# Altium PCB CPU_DIN_boards_v1_0.PcbDoc
Units mm, origin at the board's own origin, x right, y up, seen from the top; angles counter-clockwise.
Board outline 155 x 85 mm, 2 copper layers (Top Layer, Bottom Layer), stack 1.571 mm thick; 85 components, 84 nets, 319 pads, 107 vias.
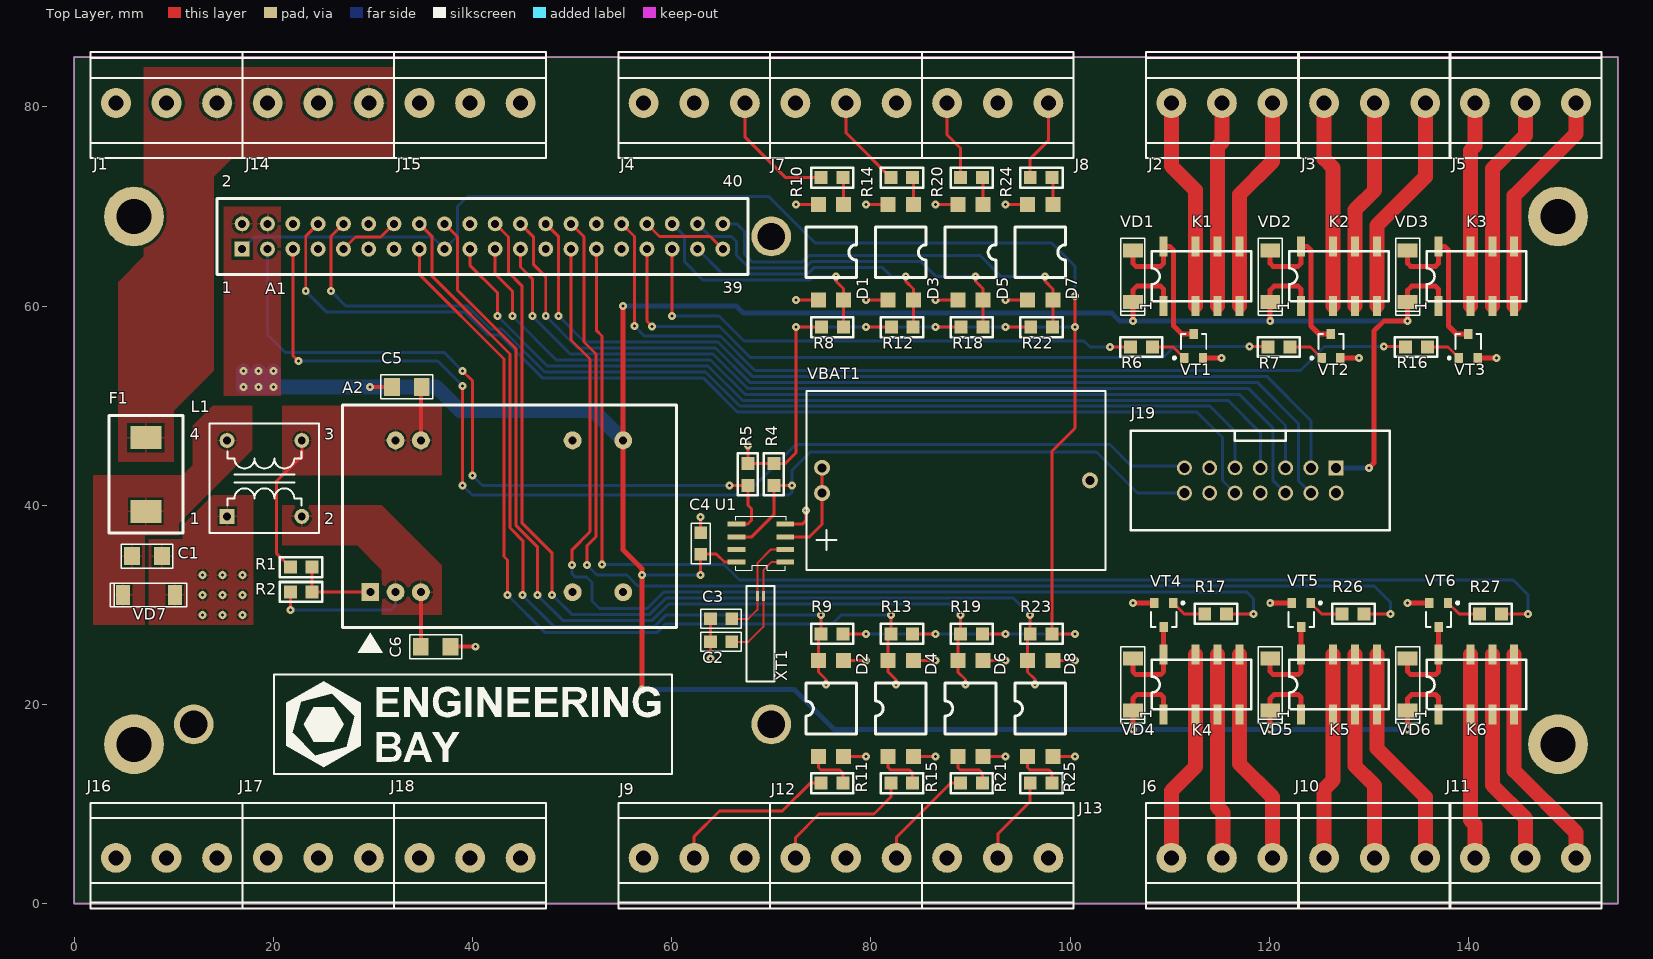
[diagram p0: Top Layer view]
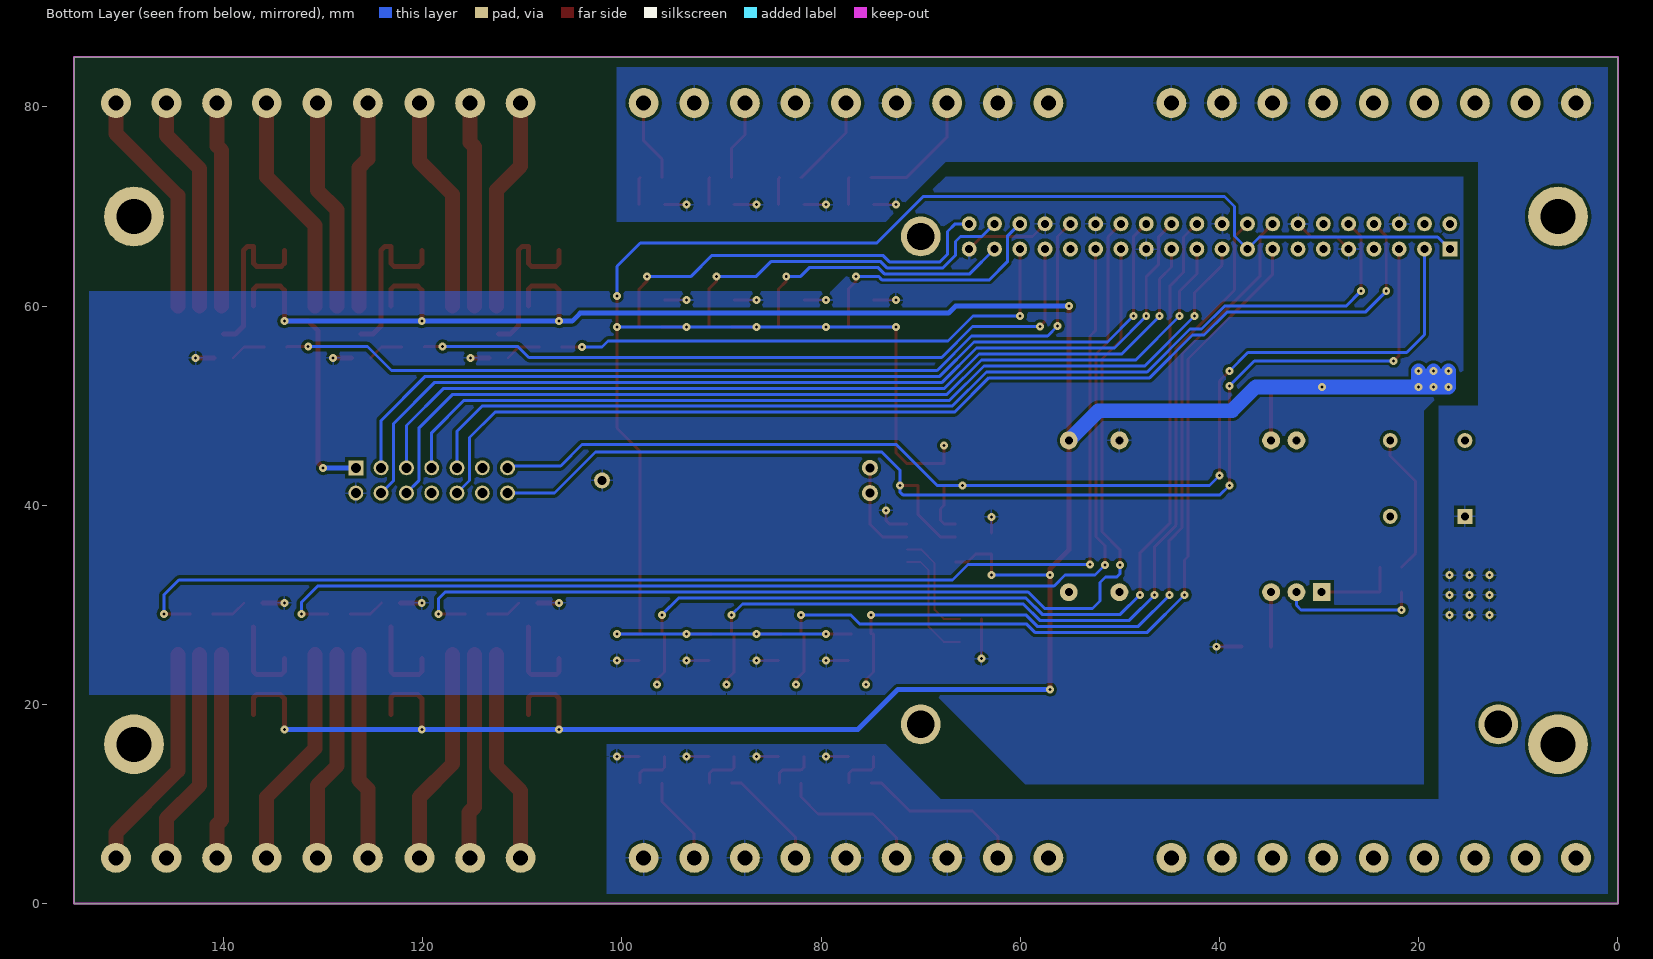
[diagram p1: Bottom Layer view, seen from below]
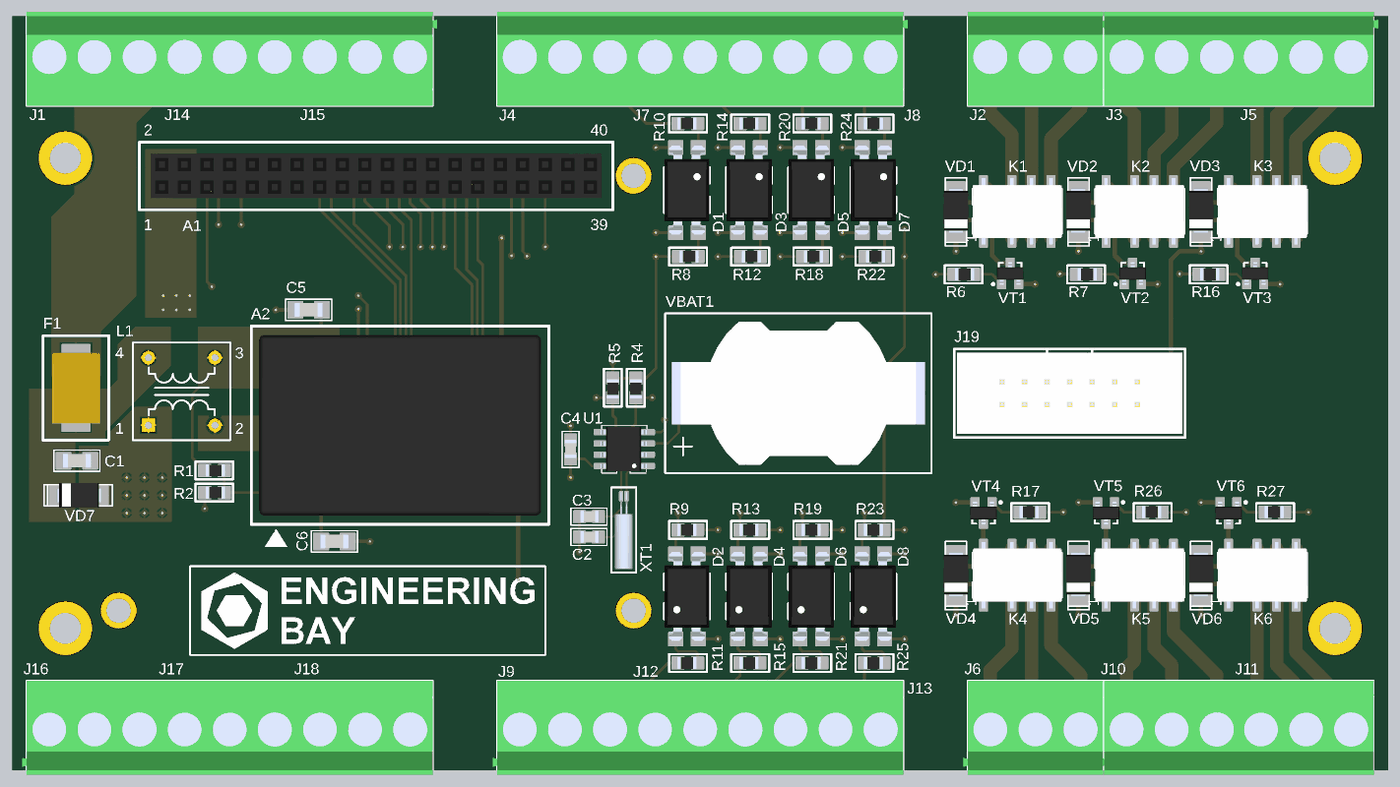
[diagram p2: 3D render of the assembled board from above, using the file's embedded part models]

## Layer stack, top to bottom
Top Solder: solder mask 0.0102, Solder Resist, Dk 3.5
Top Layer: signal copper 0.0356
Dielectric1: core 1.5, FR-4, Dk 4.8
Bottom Layer: signal copper 0.0356
Bottom Solder: solder mask 0.0102, Solder Resist, Dk 3.5

## Board outline
0,85 155,85 155,0 0,0

## Design rules (kind name [scope] priority, off if disabled: settings)
Clearance [All] p1: gap=0.3 ignorepadtopadclearanceinfootprint=FALSE except(0: Arc-Hole Track-Hole SMDPad-Hole THPad-Hole Via-Hole Fill-Hole Poly-Hole Region-Hole Text-Hole)
Clearance Logo_polygon [InNamedPolygon('logo')] p2: gap=0.01 ignorepadtopadclearanceinfootprint=FALSE except(0: Arc-Hole Track-Hole SMDPad-Hole THPad-Hole Via-Hole Fill-Hole Poly-Hole Region-Hole Text-Hole)
Clearance Polygon [InPolygon] p3: gap=0.3 ignorepadtopadclearanceinfootprint=FALSE except(0: Arc-Hole Track-Hole SMDPad-Hole THPad-Hole Via-Hole Fill-Hole Poly-Hole Region-Hole Text-Hole)
DiffPairsRouting [All] p1: maxlimit=0.2 minlimit=0.2 mostfreqgap=0.2 toplayer_minwidth=0.381 toplayer_maxwidth=0.381 toplayer_prefwidth=0.381 bottomlayer_minwidth=0.381 bottomlayer_maxwidth=0.381 bottomlayer_prefwidth=0.381 maxuncoupledlength=12.7
HoleSize [All] p1: absolutevalues=TRUE maxlimit=4 minlimit=0.025 maxpercent=80.000 minpercent=20.000
HoleToHoleClearance [All] p1: gap=0.3 allowstackedmicrovias=TRUE
MinimumSolderMaskSliver [All] p1: minsoldermaskwidth=0.1
PasteMaskExpansion [All] p1: expansion=0.1
PlaneClearance [All] p1: clearance=0.5
PlaneConnect [All] p1: planeconnectstyle=Relief reliefexpansion=0.5 reliefentries=4 reliefconductorwidth=0.2 reliefairgap=0.2
PolygonConnect [All] p1: connectstyle=Relief reliefconductorwidth=0.2 reliefentries=4 polygonreliefangle="90 Angle" airgapwidth=0.254
RoutingCorners [All] p1: cornerstyle=45-Degree minsetback=2.5 maxsetback=2.5
RoutingVias [All] p1: holewidth=0.3 width=0.8 viastyle="Through Hole" minholewidth=0.3 minwidth=0.8 maxholewidth=0.5 maxwidth=1.5
SilkToSilkClearance [All] p1: silktosilkclearance=0
SilkToSolderMaskClearance SilkscreenOverComponentPads [IsPad] p1: minsilkscreentomaskgap=0 clearancetoexposedcopper=TRUE
SolderMaskExpansion [All] p1: expansion=0.1
Width [All] p1: maxlimit=2 minlimit=0.2 preferedwidth=0.2 minimp=50.000000 maximp=50.000000 favimp=50.000000
20 further rules are at their usual default settings.

## Classes and differential pairs
component class CPU_DIN_mainboard: A1 C2 C3 C4 D1 D2 D3 D4 D5 D6 D7 D8 J2 J3 J4 J5 J6 J7 J8 J9 J10 J11 J12 J13 J16 J17 J18 J19 K1 K2 K3 K4 K5 K6 R4 R5 R6 R7 R8 R9 R10 R11 R12 R13 R14 R15 R16 R17 R18 R19 R20 R21 R22 R23 R24 R25 R26 R27 U1 VBAT1 VD1 VD2 VD3 VD4 VD5 VD6 VT1 VT2 VT3 VT4 VT5 VT6 XT1
component class CPU_DIN_mainboard_power: A2 C1 C5 C6 F1 J1 J14 J15 L1 R1 R2 VD7

## Components (designator, comment, footprint, x,y, rotation, side; value= is the part's Value field where it differs from the comment)
A1 "Raspberri Pi model B+" PBD-40 16.87,65.73 r0 top locked
A2 "TEN8-1211" dcdc_ten8-1211 43.7,38.9 r0 top
C1 "4.7uF x 50V" C1206 7.3,34.9 r0 top
C2 "12pF" C0805 66.034,26.3 r180 top
C3 "12pF" C0805 66.034,28.6 r180 top
C4 "0.1uF" C0805 62.9,37.234 r270 top
C5 "1000pF x 2kV" c1206 33.4,51.9 r180 top
C6 "1000pF x 2kV" c1206 36.3,25.8 r0 top
D1 "FOD817" DIP4_300mil_SMD 76,65.4 r270 top
D2 "FOD817" DIP4_300mil_SMD 76,19.6 r90 top
D3 "FOD817" DIP4_300mil_SMD 83,65.4 r270 top
D4 "FOD817" DIP4_300mil_SMD 83,19.6 r90 top
D5 "FOD817" DIP4_300mil_SMD 90,65.4 r270 top
D6 "FOD817" DIP4_300mil_SMD 90,19.6 r90 top
D7 "FOD817" DIP4_300mil_SMD 97,65.4 r270 top
D8 "FOD817" DIP4_300mil_SMD 97,19.6 r90 top
F1 "FUSE" MF-SM100 7.2,43.1 r270 top
J1 "Terminal block TB-3" TB-3_ser370 9.27,80.4 r180 top locked
J2 "Terminal block TB-3" TB-3_ser370 115.25,80.4 r180 top
J3 "Terminal block TB-3" TB-3_ser370 130.59,80.4 r180 top
J4 "Terminal block TB-3" TB-3_ser370 62.26,80.4 r180 top
J5 "Terminal block TB-3" TB-3_ser370 145.73,80.4 r180 top
J6 "Terminal block TB-3" TB-3_ser370 115.25,4.6 r0 top
J7 "Terminal block TB-3" TB-3_ser370 77.5,80.4 r180 top
J8 "Terminal block TB-3" TB-3_ser370 92.74,80.4 r180 top
J9 "Terminal block TB-3" TB-3_ser370 62.26,4.6 r0 top
J10 "Terminal block TB-3" TB-3_ser370 130.59,4.6 r0 top
J11 "Terminal block TB-3" TB-3_ser370 145.73,4.6 r0 top
J12 "Terminal block TB-3" TB-3_ser370 77.5,4.6 r0 top
J13 "Terminal block TB-3" TB-3_ser370 92.74,4.6 r0 top locked
J14 "Terminal block TB-3" TB-3_ser370 24.51,80.4 r180 top locked
J15 "Terminal block TB-3" TB-3_ser370 39.75,80.4 r180 top locked
J16 "Terminal block TB-3" TB-3_ser370 9.27,4.6 r0 top locked
J17 "Terminal block TB-3" TB-3_ser370 24.51,4.6 r0 top locked
J18 "Terminal block TB-3" TB-3_ser370 39.75,4.6 r0 top locked
J19 "IDC14" IDC14 119.1,42.5 r180 top
K1 "IM03GR" TYCO_2C 109.4,60 r0 top
K2 "IM03GR" TYCO_2C 123.2,60 r0 top
K3 "IM03GR" TYCO_2C 137,60 r0 top
K4 "IM03GR" TYCO_2C 109.4,19 r0 top
K5 "IM03GR" TYCO_2C 123.2,19 r0 top
K6 "IM03GR" TYCO_2C 137,19 r0 top
L1 "Common Mode Choke" TCK-050 19.1,42.7 r0 top
R1 "10k" R0805 23.9,33.8 r180 top
R2 "10k" R0805 23.9,31.3 r180 top
R4 "10k" R0805 70.25,42 r90 top
R5 "10k" R0805 67.65,42 r90 top
R6 "1k" R0805 108.277,55.9 r180 top
R7 "1k" R0805 122.077,55.9 r180 top
R8 "10k" R0805 77.25,57.9 r180 top
R9 "10k" R0805 75,27.1 r0 top
R10 "1.2k" R0805 75,72.9 r0 top
R11 "1.2k" R0805 75,12.1 r0 top
R12 "10k" R0805 84.25,57.9 r180 top
R13 "10k" R0805 82,27.1 r0 top
R14 "1.2k" R0805 82,72.9 r0 top
R15 "1.2k" R0805 82,12.1 r0 top
R16 "1k" R0805 135.877,55.9 r180 top
R17 "1k" R0805 113.523,29.1 r0 top
R18 "10k" R0805 91.25,57.9 r180 top
R19 "10k" R0805 89,27.1 r0 top
R20 "1.2k" R0805 89,72.9 r0 top
R21 "1.2k" R0805 89,12.1 r0 top
R22 "10k" R0805 98.25,57.9 r180 top
R23 "10k" R0805 96,27.1 r0 top
R24 "1.2k" R0805 96,72.9 r0 top
R25 "1.2k" R0805 96,12.1 r0 top
R26 "1k" R0805 127.323,29.1 r0 top
R27 "1k" R0805 141.123,29.1 r0 top
U1 "DS1307" SO-8_LM358D 71.4,34.3 r90 top
VBAT1 "Battery 2032" Battery_CR2032 102,42.5 r180 top
VD1 "BAV199" "SMA DIOD" 106.3,65.6 r270 top
VD2 "BAV199" "SMA DIOD" 120.1,65.6 r270 top
VD3 "BAV199" "SMA DIOD" 133.9,65.6 r270 top
VD4 "BAV199" "SMA DIOD" 106.3,24.6 r270 top
VD5 "BAV199" "SMA DIOD" 120.1,24.6 r270 top
VD6 "BAV199" "SMA DIOD" 133.9,24.6 r270 top
VD7 "15MQ040N" "SMA DIOD" 10.1,31 r180 top
VT1 "BC817" SOT23 112.4,56 r0 top
VT2 "BC817" SOT23 126.2,56 r0 top
VT3 "BC817" SOT23 140,56 r0 top
VT4 "BC817" SOT23 109.4,29 r180 top
VT5 "BC817" SOT23 123.2,29 r180 top
VT6 "BC817" SOT23 137,29 r180 top
XT1 "32kHz" XTAL_d2x6mm 68.9,28.9 r90 top

## Footprints (in the part's own frame and the unit in brackets; to place one, negate y for a bottom-side part, rotate by r counter-clockwise, add the part's x,y. Pads: shape width x height; smd on the part's side, far side on the other; paste and mask are expansions set on the pad)
Battery_CR2032 [mm]
  round 1.6 hole 0.9: 1(26.9,-1.27) 2(26.9,1.27) 3(0,0)
  silkscreen extent -1.55,-9 28.45,9, body extent -0.8,-8.05 27.7,8.05, height 5.2
C0805 [mil]
  rect 50x50 smd: 1(0,0) 2(84,0)
  silkscreen extent -38,-38 122,38, body extent -2,-27 81,27, height 53
C1206 [mm]
  rect 1.6x1.8 smd: 1(-1.5,0) 2(1.5,0)
  silkscreen extent -2.6,-1.2 2.6,1.2, body extent -1.6,-0.8 1.6,0.8, height 1.5
c1206 [mm]
  rect 1.6x1.8 smd: 1(-1.5,0) 2(1.5,0)
  silkscreen extent -2.6,-1.2 2.6,1.2, body extent -1.6,-0.8 1.6,0.8, height 1.5
dcdc_ten8-1211 [mm]
  rect 1.8x1.8 hole 0.8: 1(-13.97,-7.62)
  round 1.8 hole 0.8: 2(-11.43,-7.62) 3(-8.89,-7.62) 9(6.35,-7.62) 11(11.43,-7.62) 14(11.43,7.62) 16(6.35,7.62) 22(-8.89,7.62) 23(-11.43,7.62)
  silkscreen extent -16.76,-13.72 16.76,11.18, body extent -15.87,-10.16 15.88,10.16, height 10.16
DIP4_300mil_SMD [mm]
  rect 1.5x1.5 smd: 1(-4.8,1.27) 2(-4.8,-1.27) 3(4.8,-1.27) 4(4.8,1.27)
  silkscreen extent -2.54,-2.54 2.54,2.54, body extent -5,-2.54 5,2.54, height 3.7
IDC14 [mm]
  rect 1.5x1.5 hole 1: 1(-7.62,-1.27)
  round 1.5 hole 1: 2(-7.62,1.27) 3(-5.08,-1.27) 4(-5.08,1.27) 5(-2.54,-1.27) 6(-2.54,1.27) 7(0,-1.27) 8(0,1.27) 9(2.54,-1.27) 10(2.54,1.27) 11(5.08,-1.27) 12(5.08,1.27) 13(7.62,-1.27) 14(7.62,1.27)
  silkscreen extent -13,-5 13,5, body extent -12.69,-4.55 12.69,4.55, height 9
MF-SM100 [mm]
  rect 2.3x3.1 smd: 1(-3.7,0) 2(3.7,0)
  silkscreen extent -5.9,-3.7 5.9,3.7, body extent -4,-2.7 4,2.7, height 3
PBD-40 [mm]
  rect 1.5x1.5 hole 0.8: 1(0,0)
  round 1.5 hole 0.8: 2(0,2.54) 3(2.54,0) 4(2.54,2.54) 5(5.08,0) 6(5.08,2.54) 7(7.62,0) 8(7.62,2.54) 9(10.16,0) 10(10.16,2.54) 11(12.7,0) 12(12.7,2.54) 13(15.24,0) 14(15.24,2.54) 15(17.78,0) 16(17.78,2.54) 17(20.32,0) 18(20.32,2.54) 19(22.86,0) 20(22.86,2.54) 21(25.4,0) 22(25.4,2.54) 23(27.94,0) 24(27.94,2.54) 25(30.48,0) 26(30.48,2.54) 27(33.02,0) 28(33.02,2.54) 29(35.56,0) 30(35.56,2.54) 31(38.1,0) 32(38.1,2.54) 33(40.64,0) 34(40.64,2.54) 35(43.18,0) 36(43.18,2.54) 37(45.72,0) 38(45.72,2.54) 39(48.26,0) 40(48.26,2.54)
  silkscreen extent -2.54,-2.54 50.8,5.08, body extent -1.27,-1.27 49.53,3.81, height 8.5
R0805 [mm]
  rect 1.3x1.3 smd: 1(0,0) 2(2.2,0)
  silkscreen extent -1,-1 3.25,1, body extent -0.1,-0.7 2.1,0.7, height 0.55
"SMA DIOD" [mm]
  rect 1.4x2 smd: A(0,0) K(5.195,0)
  silkscreen extent -1.2,-1.2 6.49,1.2, body extent 0.02,-1.4 5.06,1.4, height 2.1
SO-8_LM358D [mm]
  rect 0.5x1.8 smd: 1(0,0) 2(1.27,0) 3(2.54,0) 4(3.81,0) 5(3.81,4.9) 6(2.54,4.9) 7(1.27,4.9) 8(0,4.9)
  silkscreen extent -0.8,-0.1 4.6,5, body extent -0.6,-0.06 4.4,5.14, height 1.7
SOT23 [mm] "SOT-23; 3 Leads; Body 3.0 x 2.5 mm, inc. leads (LxW max)"
  rect 0.85x1 smd: 1(-0.95,-1.2) 2(0.95,-1.2) 3(0,1.2)
  silkscreen extent -2.05,-1.32 1.28,1.2, body extent -1.5,-1.25 1.5,1.25, height 1.14
TB-3_ser370 [mm]
  round 3 hole 1.5: 1(-5.08,0) 2(0,0) 3(5.08,0)
  silkscreen extent -7.62,-5.1 7.62,5.5, body extent -8.12,-5.1 7.62,5.5, height 18.2
TCK-050 [mm]
  rect 1.5x1.5 hole 0.8: 1(-3.75,-3.81)
  round 1.5 hole 0.8: 2(3.75,-3.81) 3(3.75,3.81) 4(-3.75,3.81)
  silkscreen extent -5.5,-5.5 5.5,5.5
TYCO_2C [mm]
  rect 0.8x2 smd: 1(0,0) 2(3.2,0) 3(5.4,0) 4(7.6,0) 5(7.6,6) 6(5.4,6) 7(3.2,6) 8(0,6)
  silkscreen extent -1.2,0.5 8.8,5.5, body extent -1.2,-0.75 8.8,6.75, height 5.65
XTAL_d2x6mm [mm]
  rect 1x0.3 smd: 1(2,0.3) 2(2,-0.3)
  silkscreen extent -6.6,-1.4 3,1.4, body extent -6.2,-1 2.5,1, height 2

## Part data
A1: library part RPi_Bplus
A2: "Traco Isolated DC/DC"
C1 C2 C3 C4 C5 C6: library part CAP_SMD
J1 J2 J3 J4 J5 J6 J7 J8 J9 J10 J11 J12 J13 J14 J15 J16 J17 J18: library part TB-3
K1 K2 K3 K4 K5 K6: library part IM06GR
L1: library part L_CHOKE
R1 R2 R4 R5 R6 R7 R8 R9 R10 R11 R12 R13 R14 R15 R16 R17 R18 R19 R20 R21 R22 R23 R24 R25 R26 R27: library part RES_SMD
VBAT1: library part BATTERY_2032
VD1 VD2 VD3 VD4 VD5 VD6 VD7: library part DIOD
XT1: library part XTAL

## Free pads (board coordinates)
  round 6 hole 3.5: MH(6,16) MH(6,69) MH(149,16) MH(149,69)
  round 4 hole 2.75: MH(12,18) MH(70,18) MH(70,67)

## Via types
v1: diameter 0.8, hole 0.3, Top Layer to Bottom Layer, tented both sides, 107 vias

## Nets (pads, with @x,y where several pads share a name; then routed paths per layer and width w, separated by ;. In a path a pad name is that pad's centre, name@x,y a point inside that pad or via, vN(x,y) a via of type N, cw(c..) or ccw(c..) an arc to the next point about the centre after c; other vN are vias at no path point)
12V+: F1.1 J1.1 J14.1 J14.2 J14.3
12V-: C1.2 D1.2 D2.2 D3.2 D4.2 D5.2 D6.2 D7.2 D8.2 J1.3 J4.2 J7.1 J7.3 J8.2 J9.3 J12.2 J13.1 J13.3 J15.1 J15.2 J15.3 L1.1 VD7.A | length 17.9
  Top Layer w0.3: J4.2 J4.2@62.3,80.4 ; v1(72.5,70.2) D1.2 ; D2.2 v1(79.5,14.8) ; v1(79.5,70.2) D3.2 ; D4.2 v1(86.5,14.8) ; v1(86.5,70.2) D5.2 ; D6.2 v1(93.5,14.8) ; v1(93.5,70.2) D7.2 ; D8.2 v1(100.5,14.8)
  other v1: 12.9,29 14.9,29 16.9,29 12.9,31 14.9,31 16.9,31 12.9,33 14.9,33 16.9,33
12V_F+: A2.22 A2.23 C5.1 L1.3 R1.2 | length 19.7
  Top Layer w0.3: R1.2 20.3,35.2 20.3,42.4 22.85,44.95 L1.3 ; C5.1@34.8,51.9 C5.1@34.81,51.89
  Top Layer w0.4: A2.22 C5.1@34.81,51.89
+3.3V: A1.1 A1.17 R4.2 R5.2 R8.2 R9.2 R12.2 R13.2 R18.2 R19.2 R22.2 R23.2 | length 218.4
  Top Layer w0.3: v1(67.65,46) R5.2 R4.2 71.4,44.2 72.5,45.3 v1(72.5,57.9) R8.2 ; R9.2@76.95,27.1 v1(79.5,27.1) ; v1(79.5,57.9) R12.2 ; R13.2@83.95,27.1 v1(86.5,27.1) ; v1(86.5,57.9) R18.2 ; R19.2@90.95,27.1 v1(93.5,27.1) ; v1(93.5,57.9) R22.2 ; R23.2@97.95,27.1 v1(100.5,27.1) ; R23.2 98.2,45.45 100.5,47.75 v1(100.5,57.9) v1(100.5,61)
  Bottom Layer w0.3: A1.1 18.09,66.95 35.97,66.95 A1.17 38.5,67.04 38.5,70 39.5,71 69.75,71 74.4,66.35 98.15,66.35 100.5,64 v1(100.5,61) ; v1(72.5,57.9) v1(79.5,57.9) v1(86.5,57.9) v1(93.5,57.9) v1(100.5,57.9) ; v1(79.5,27.1) v1(86.5,27.1) v1(93.5,27.1) v1(100.5,27.1)
+5V: A1.2 A1.4 A2.14 C4.2 C5.2 J19.1 K1.1 K2.1 K3.1 K4.1 K5.1 K6.1 U1.8 VD1.K VD2.K VD3.K VD4.K VD5.K VD6.K | length 326.8
  Top Layer w0.3: v1(62.9,33) C4.2 64.5,35.1 65.3,34.3 U1.8
  Top Layer w0.4: v1(29.7,51.9) C5.2
  Top Layer w0.5: v1(55.13,60) A2.14 55.13,35.52 57,33.65 v1(57,33) v1(57,21.5) ; v1(106.3,17.5) VD4.K 106.3,20.6 106.7,21 109.1,21 109.4,20.7 K4.1 ; v1(106.3,58.5) VD1.K 106.3,61.6 106.7,62 109.1,62 109.4,61.7 K1.1 ; v1(120.1,17.5) VD5.K 120.1,20.6 120.5,21 122.9,21 123.2,20.7 K5.1 ; v1(120.1,58.5) VD2.K 120.1,61.6 120.5,62 122.9,62 123.2,61.7 K2.1 ; v1(130,43.75) 130.5,44.25 130.5,57.5 131.5,58.5 v1(133.9,58.5) VD3.K 133.9,61.6 134.3,62 136.7,62 137,61.7 K3.1 ; v1(133.9,17.5) VD6.K 133.9,20.6 134.3,21 136.7,21 137,20.7 K6.1
  Bottom Layer w0.3: v1(57,33) v1(62.9,33)
  Bottom Layer w0.5: v1@55,60 v1(55.13,60) 66.5,60 67.2,59.3 104.2,59.3 105,58.5 v1(106.3,58.5) v1(120.1,58.5) v1(133.9,58.5) ; v1(57,21.5) 72.3,21.5 76.3,17.5 v1(106.3,17.5) v1(120.1,17.5) v1(133.9,17.5) ; J19.1 126.74,43.75 v1(130,43.75)
  Bottom Layer w1.5: v1(17,53.5) v1(17,51.9) v1(18.5,51.9) ; v1(18.5,53.5) v1(18.5,51.9) ; v1(20,53.5) v1(20,51.9) ; A2.14 52.15,49.5 38.75,49.5 36.35,51.9 v1(29.7,51.9) v1(20,51.9) ; v1(18.5,51.9) v1(20,51.9)
DI_0: J4.1 R10.1 | length 12.8
  Top Layer w0.3: J4.1 67.34,77.01 71.45,72.9 R10.1
DI_1: J7.2 R14.1 | length 9.4
  Top Layer w0.3: J7.2 77.5,77.4 R14.1
DI_2: J8.3 R20.1 | length 8.1
  Top Layer w0.3: J8.3 87.66,77.19 89,75.85 R20.1
DI_3: J8.1 R24.1 | length 8.3
  Top Layer w0.3: R24.1 96,74.8 97.82,76.62 J8.1
DI_4: J9.2 R11.1 | length 17.1
  Top Layer w0.3: J9.2 62.26,6.76 64.8,9.3 71.1,9.3 73.9,12.1 R11.1
DI_5: J12.1 R15.1 | length 14.7
  Top Layer w0.3: J12.1 72.42,6.62 74.8,9 80.3,9 82,10.7 R15.1
DI_6: J12.3 R21.1 | length 10.7
  Top Layer w0.3: J12.3 82.58,6.68 88,12.1 R21.1
DI_7: J13.2 R25.1 | length 8.9
  Top Layer w0.3: J13.2 92.74,6.99 96,10.25 R25.1
GND: A1.6 A1.9 A1.14 A1.20 A1.25 A1.30 A1.34 A1.39 A2.16 C2.2 C3.2 C4.1 C6.2 D1.3 D2.3 D3.3 D4.3 D5.3 D6.3 D7.3 D8.3 J19.2 U1.4 VBAT1.3 VT1.2 VT2.2 VT3.2 VT4.2 VT5.2 VT6.2 | length 56
  Top Layer w0.3: A1.9 28.25,66.95 30.79,66.95 A1.14 ; A1.34 58.78,67 63.86,67 A1.39 ; C4.1 v1(62.9,38.85) ; v1(63.9,24.6) C2.2 C3.2 ; U1.4 73.11,38.11 73.5,38.5 v1(73.5,39.5) ; v1(72.5,60.6) D1.3 ; D2.3 v1(79.5,24.4) ; v1(79.5,60.6) D3.3 ; D4.3 v1(86.5,24.4) ; v1(86.5,60.6) D5.3 ; D6.3 v1(93.5,24.4) ; v1(93.5,60.6) D7.3 ; D8.3 v1(100.5,24.4)
  Top Layer w0.4: C6.2 v1(40.3,25.8)
  Top Layer w0.5: v1(106.3,30.2) VT4.2 ; VT1.2 v1(115.2,54.8) ; v1(120.1,30.2) VT5.2 ; VT2.2 v1(129,54.8) ; v1(133.9,30.2) VT6.2 ; VT3.2 v1(142.8,54.8)
GPIO_6: A1.31
GPIO_27: A1.13
HOST_RX: A1.10 J19.9 | length 107.5
  Top Layer w0.3: v1(25.8,61.5) 25.8,67.04 A1.10
  Bottom Layer w0.3: v1(25.8,61.5) 27.3,60 39.499,60 41.799,57.7 42.951,57.7 47.251,53.4 63.401,53.4 66.851,49.95 114.05,49.95 116.56,47.44 J19.9
HOST_TX: A1.8 J19.10 | length 111.5
  Top Layer w0.3: v1(23.25,61.5) 23.25,67.03 A1.8
  Bottom Layer w0.3: v1(23.25,61.5) 25.35,59.4 39.25,59.4 41.55,57.1 42.703,57.1 47.003,52.8 63.153,52.8 66.603,49.35 112.75,49.35 115.3,46.8 115.3,42.49 J19.10
I2C_SCL: A1.5 J19.14 R4.1 U1.6 | length 126.1
  Top Layer w0.3: A1.5 21.95,55.05 v1(22.5,54.5) ; v1(39,42) v1(39,52) ; U1.6 68.04,36.84 70.25,39.05 R4.1 v1(72.1,42)
  Bottom Layer w0.3: v1(22.5,54.5) 36.5,54.5 v1(39,52) ; v1(39,42) 39.95,41.05 71.8,41.05 72.1,41.35 v1(72.1,42) 72.1,43.55 73.9,45.35 102.65,45.35 106.77,41.23 J19.14
I2C_SDA: A1.3 J19.13 R5.1 U1.5 | length 122.3
  Top Layer w0.3: v1(39,53.5) 40,52.5 v1(40,43) ; v1(65.8,42) R5.1 67.65,40 68,39.65 68,38.5 67.61,38.11 U1.5
  Bottom Layer w0.3: A1.3 19.41,57.14 21.2,55.35 37.15,55.35 v1(39,53.5) ; v1(40,43) 41,42 v1(65.8,42) 68.35,42 72.45,46.1 104,46.1 106.15,43.95 111.3,43.95 J19.13
NetA2_1: A2.1 R1.1 R2.1 | length 8.3
  Top Layer w0.3: R1.1 R2.1 29.71,31.3 A2.1
NetA2_2: A2.2 A2.3 C6.1 L1.2 R2.2 | length 19.4
  Top Layer w0.3: v1(21.7,29.5) R2.2 ; C6.1 C6.1@34.81,25.81
  Top Layer w0.4: C6.1@34.81,25.81 A2.3
  Bottom Layer w0.3: v1(21.7,29.5) 31.8,29.5 32.27,29.97 A2.2
NetC1_1: C1.1 F1.2 L1.4 VD7.K
NetC2_1: C2.1 U1.1 XT1.2 | length 12
  Top Layer w0.2: C2.1 67.7,26.3 69.2,27.8 XT1.2 69.2,33.5 70,34.3 U1.1
NetC3_1: C3.1 U1.2 XT1.1 | length 11
  Top Layer w0.2: C3.1 67.7,28.6 68.6,29.5 XT1.1 68.6,34.2 69.97,35.57 U1.2
NetD1_1: D1.1 R10.2 | length 2.7
  Top Layer w0.3: R10.2 77.27,72.83 D1.1
NetD2_1: D2.1 R11.2 | length 4.8
  Top Layer w0.3: D2.1 74.73,13.67 75,13.4 76.9,13.4 77.2,13.1 R11.2
NetD3_1: D3.1 R14.2 | length 2.7
  Top Layer w0.3: R14.2 84.27,72.83 D3.1
NetD4_1: D4.1 R15.2 | length 4.8
  Top Layer w0.3: D4.1 81.73,13.67 82,13.4 83.9,13.4 84.2,13.1 R15.2
NetD5_1: D5.1 R20.2 | length 2.7
  Top Layer w0.3: R20.2 91.27,72.83 D5.1
NetD6_1: D6.1 R21.2 | length 4.8
  Top Layer w0.3: D6.1 88.73,13.67 89,13.4 90.9,13.4 91.2,13.1 R21.2
NetD7_1: D7.1 R24.2 | length 2.7
  Top Layer w0.3: R24.2 98.27,72.83 D7.1
NetD8_1: D8.1 R25.2 | length 4.8
  Top Layer w0.3: D8.1 95.73,13.67 96,13.4 97.9,13.4 98.2,13.1 R25.2
NetJ2_1: J2.1 K1.4 K1.5 | length 21.8
  Top Layer w1.5: K1.4 K1.5 117,71.2 120.33,74.53 J2.1
NetJ2_2: J2.2 K1.3 K1.6 | length 20.6
  Top Layer w1.5: K1.3 K1.6 114.8,76 115.25,76.45 J2.2
NetJ2_3: J2.3 K1.2 K1.7 | length 21.4
  Top Layer w1.5: J2.3 110.17,74.08 112.6,71.65 K1.7 K1.2
NetJ3_1: J3.1 K2.4 K2.5 | length 22.4
  Top Layer w1.5: K2.4 K2.5 130.8,68.1 135.67,72.97 J3.1
NetJ3_2: J3.2 K2.3 K2.6 | length 21.2
  Top Layer w1.5: K2.3 K2.6 128.6,69.65 130.59,71.64 J3.2
NetJ3_3: J3.3 K2.2 K2.7 | length 20.8
  Top Layer w1.5: J3.3 125.51,74.79 126.4,73.9 K2.7 K2.2
NetJ5_1: J5.1 K3.4 K3.5 | length 23
  Top Layer w1.5: K3.4 K3.5 144.6,71.1 150.81,77.31 J5.1
NetJ5_2: J5.2 K3.3 K3.6 | length 21.8
  Top Layer w1.5: K3.3 K3.6 142.4,73.8 145.73,77.13 J5.2
NetJ5_3: J5.3 K3.2 K3.7 | length 20.6
  Top Layer w1.5: K3.2 K3.7 140.2,75.65 140.65,76.1 J5.3
NetJ6_1: J6.1 K4.2 K4.7 | length 21.4
  Top Layer w1.5: J6.1 110.17,11.32 112.6,13.75 K4.2 K4.7
NetJ6_2: J6.2 K4.3 K4.6 | length 20.7
  Top Layer w1.5: K4.6 K4.3 114.8,9.7 115.35,9.15 115.35,4.7 J6.2
NetJ6_3: J6.3 K4.4 K4.5 | length 21.8
  Top Layer w1.5: K4.5 K4.4 117,14.05 120.33,10.72 J6.3
NetJ10_1: J10.1 K5.2 K5.7 | length 20.8
  Top Layer w1.5: J10.1 125.51,11.51 126.4,12.4 K5.2 K5.7
NetJ10_2: J10.2 K5.3 K5.6 | length 21.2
  Top Layer w1.5: K5.6 K5.3 128.6,13.85 130.59,11.86 J10.2
NetJ10_3: J10.3 K5.4 K5.5 | length 22.4
  Top Layer w1.5: K5.5 K5.4 130.8,15.6 135.67,10.73 J10.3
NetJ11_1: J11.1 K6.2 K6.7 | length 20.6
  Top Layer w1.5: K6.7 K6.2 140.2,8.4 140.65,7.95 J11.1
NetJ11_2: J11.2 K6.3 K6.6 | length 21.8
  Top Layer w1.5: K6.6 K6.3 142.4,11.9 145.73,8.57 J11.2
NetJ11_3: J11.3 K6.4 K6.5 | length 23
  Top Layer w1.5: K6.5 K6.4 144.6,13.35 150.81,7.14 J11.3
NetK1_8: K1.8 VD1.A VT1.3 | length 17.4
  Top Layer w0.5: VD1.A 106.3,64.3 106.6,64 109.1,64 109.4,64.3 K1.8 110,66 110.4,65.6 110.4,58 111.2,57.2 VT1.3
NetK2_8: K2.8 VD2.A VT2.3 | length 17.4
  Top Layer w0.5: VD2.A 120.1,64.3 120.4,64 122.9,64 123.2,64.3 K2.8 123.8,66 124.2,65.6 124.2,58 125,57.2 VT2.3
NetK3_8: K3.8 VD3.A VT3.3 | length 17.4
  Top Layer w0.5: VD3.A 133.9,64.3 134.2,64 136.7,64 137,64.3 K3.8 137.6,66 138,65.6 138,58 138.8,57.2 VT3.3
NetK4_8: K4.8 VD4.A VT4.3 | length 9.1
  Top Layer w0.5: VD4.A 106.3,23.3 106.6,23 109.1,23 109.4,23.3 K4.8 VT4.3
NetK5_8: K5.8 VD5.A VT5.3 | length 9.1
  Top Layer w0.5: VD5.A 120.1,23.3 120.4,23 122.9,23 123.2,23.3 K5.8 VT5.3
NetK6_8: K6.8 VD6.A VT6.3 | length 9.1
  Top Layer w0.5: VD6.A 133.9,23.3 134.2,23 136.7,23 137,23.3 K6.8 VT6.3
NetR6_1: R6.1 VT1.1 | length 3.6
  Top Layer w0.3: R6.1 110.35,55.9 VT1.1
NetR7_1: R7.1 VT2.1 | length 3.6
  Top Layer w0.3: R7.1 124.15,55.9 VT2.1
NetR16_1: R16.1 VT3.1 | length 3.6
  Top Layer w0.3: R16.1 137.95,55.9 VT3.1
NetR17_1: R17.1 VT4.1 | length 3.6
  Top Layer w0.3: VT4.1 111.45,29.1 R17.1
NetR26_1: R26.1 VT5.1 | length 3.6
  Top Layer w0.3: VT5.1 125.25,29.1 R26.1
NetR27_1: R27.1 VT6.1 | length 3.6
  Top Layer w0.3: VT6.1 139.05,29.1 R27.1
OUT: U1.7
PU0: A1.36 D1.4 R8.1 | length 25.9
  Top Layer w0.3: v1(76.5,63) 76.5,62.5 77.27,61.73 D1.4 77.27,57.92 R8.1
  Bottom Layer w0.3: A1.36 61.3,67.02 61.3,64.45 63.1,62.65 73.899,62.65 74.249,63 v1(76.5,63)
PU1: A1.37 D3.4 R12.1 | length 28
  Top Layer w0.3: v1(83.5,63) 83.5,62.5 84.27,61.73 D3.4 84.27,57.92 R12.1
  Bottom Layer w0.3: A1.37 65.07,63.25 73.65,63.25 74.3,63.9 81.15,63.9 82.05,63 v1(83.5,63)
PU2: A1.38 D5.4 R18.1 | length 36.9
  Top Layer w0.3: v1(90.5,63) 90.5,62.5 91.27,61.73 D5.4 91.27,57.92 R18.1
  Bottom Layer w0.3: A1.38 63.86,67 66,67 66.5,66.5 66.5,65.1 67.75,63.85 73.399,63.85 74.049,64.5 85,64.5 86.5,63 v1(90.5,63)
PU3: A1.40 D7.4 R22.1 | length 41.9
  Top Layer w0.3: v1(97.5,63) 97.5,62.5 98.27,61.73 D7.4 98.27,57.92 R22.1
  Bottom Layer w0.3: A1.40 66.53,68.27 67.3,67.5 67.3,65.2 68.05,64.45 73.15,64.45 73.8,65.1 90.95,65.1 93.05,63 v1(97.5,63)
PU4: A1.16 D2.4 R9.1 | length 80.7
  Top Layer w0.3: A1.16 35.95,66.97 35.95,63 43.75,55.2 43.75,37.753 45.05,36.453 45.05,31.05 v1(45,31) ; R9.1@74.75,27.1 74.73,27.08 D2.4 74.73,23.27 75.5,22.5 v1(75.5,22) ; R9.1 v1(75,29)
  Bottom Layer w0.3: v1(45,31) 48.15,27.85 58.296,27.85 59.446,29 v1(75,29)
PU5: A1.15 D4.4 R13.1 | length 86.5
  Top Layer w0.3: A1.15 34.65,63.2 43.15,54.7 43.15,34.85 43.5,34.5 v1(43.5,31) ; R13.1@81.75,27.1 81.73,27.08 D4.4 81.73,23.27 82.5,22.5 v1(82.5,22) ; R13.1 v1(82,29)
  Bottom Layer w0.3: v1(43.5,31) 47.25,27.25 58.544,27.25 59.394,28.1 76.15,28.1 77.05,29 v1(82,29)
PU6: A1.18 D6.4 R19.1 | length 93.1
  Top Layer w0.3: A1.18 38.5,66.96 38.5,61.6 44.35,55.75 44.35,38.001 46.5,35.851 v1(46.5,31) ; R19.1@88.75,27.1 88.73,27.08 D6.4 88.73,23.27 89.5,22.5 v1(89.5,22) ; R19.1 v1(89,29)
  Bottom Layer w0.3: v1(46.5,31) 49.05,28.45 58.047,28.45 59.697,30.1 87.9,30.1 v1(89,29)
PU7: A1.22 D8.4 R23.1 | length 97.2
  Top Layer w0.3: A1.22 43.6,66.94 43.6,63.4 44.95,62.05 44.95,38.25 48,35.2 v1(48,31) ; R23.1@95.75,27.1 95.73,27.08 D8.4 95.73,23.27 96.5,22.5 v1(96.5,22) ; R23.1 v1(96,29)
  Bottom Layer w0.3: v1(48,31) 49.95,29.05 57.799,29.05 59.449,30.7 94.3,30.7 v1(96,29)
RL1: A1.35 R6.2 | length 54
  Top Layer w0.3: v1(60.05,59) A1.35 ; v1(104,55.9) R6.2
  Bottom Layer w0.3: v1(60.05,59) 64.75,59 67.25,56.5 101.4,56.5 102,55.9 v1(104,55.9)
RL2: A1.33 R7.2 | length 71.6
  Top Layer w0.3: A1.33 57.51,58.49 58,58 v1(58,57.95) ; v1(118,55.95) 119.827,55.95 R7.2
  Bottom Layer w0.3: v1(58,57.95) 64.791,57.95 67.891,54.85 109.35,54.85 110.45,55.95 v1(118,55.95)
RL3: A1.32 R16.2 | length 91.1
  Top Layer w0.3: A1.32 56.25,66.99 v1(56.25,58) ; v1(131.5,55.95) 133.627,55.95 R16.2
  Bottom Layer w0.3: v1(56.25,58) 57.25,57 64.893,57 68.343,53.55 123.15,53.55 125.55,55.95 v1(131.5,55.95)
RL4: A1.27 R17.2 | length 109.8
  Top Layer w0.3: A1.27 49.89,56.61 51.8,54.7 51.8,37.35 50,35.55 v1(50,34) ; R17.2 v1(118.4,29.1)
  Bottom Layer w0.3: 50,33.55 50,33.1 50.3,32.8 51.45,32.8 52,32.25 52,30.4 52.75,29.65 57.55,29.65 59.2,31.3 117.75,31.3 118.4,30.65 v1(118.4,29.1)
RL5: A1.28 R26.2 | length 121.8
  Top Layer w0.3: A1.28 51.2,66.96 51.2,58 51.2,56.4 52.4,55.2 52.4,36.85 51.5,35.95 v1(51.5,34) ; R26.2 v1(132.2,29.1)
  Bottom Layer w0.3: v1(51.5,34) 52.5,33 55.5,33 56.6,31.9 130.55,31.9 132.2,30.25 v1(132.2,29.1)
RL6: A1.29 R27.2 | length 130.8
  Top Layer w0.3: A1.29 52.43,57.57 53,57 v1(53,34.05) ; R27.2 v1(146,29.1)
  Bottom Layer w0.3: v1(53,34.05) 65.25,34.05 66.8,32.5 144.5,32.5 146,31 v1(146,29.1)
SPI_MISO: A1.21 J19.6 | length 95.5
  Top Layer w0.3: A1.21 42.27,63.23 44,61.5 v1(44,59)
  Bottom Layer w0.3: v1(44,59) 48.4,54.6 63.899,54.6 67.349,51.15 117,51.15 120.4,47.75 120.4,42.47 J19.6
SPI_MOSI: A1.19 J19.7 | length 92.9
  Top Layer w0.3: A1.19 39.73,64.12 42.5,61.35 v1(42.5,59)
  Bottom Layer w0.3: v1(42.5,59) 47.5,54 63.65,54 67.1,50.55 115.85,50.55 119.1,47.3 J19.7
SPI_NCS0: A1.24 J19.4 | length 97.9
  Top Layer w0.3: A1.24 46.1,66.98 46.1,64.2 47.35,62.95 v1(47.35,59)
  Bottom Layer w0.3: v1(47.35,59) 50.55,55.8 64.396,55.8 67.846,52.35 118.8,52.35 122.95,48.2 122.95,42.46 J19.4
SPI_NCS1: A1.26 J19.3 | length 94.4
  Top Layer w0.3: A1.26 48.65,66.97 v1(48.65,59)
  Bottom Layer w0.3: v1(48.65,59) 51.25,56.4 64.644,56.4 68.094,52.95 119.75,52.95 124.18,48.52 J19.3
SPI_SCLK: A1.23 J19.5 | length 91.7
  Top Layer w0.3: A1.23 44.81,63.94 46,62.75 v1(46,59)
  Bottom Layer w0.3: v1(46,59) 49.8,55.2 64.147,55.2 67.597,51.75 117.9,51.75 121.64,48.01 J19.5
VBAT: U1.3 VBAT1.1 VBAT1.2 | length 9.9
  Top Layer w0.3: U1.3 73.84,36.84 75.1,38.1 VBAT1.2 VBAT1.1
pads on no net: A1.7 A1.11 A1.12 A2.9 A2.11 J1.2 J4.3 J9.1 J16.1 J16.2 J16.3 J17.1 J17.2 J17.3 J18.1 J18.2 J18.3 J19.8 J19.11 J19.12

## Polygon pours and split planes (outlines as drawn)
12V+ on Top Layer "+12v" (solid, remove dead copper, pour order 14): 7,84 32,84 32,75 16,75 14,73 14,53.5 10,49.5 10,44.4 4.4,44.4 4.4,62.4 7,65
12V- on Top Layer "-12v" (solid, remove dead copper, pour order 12): 18,41 18,28 7.5,28 7.5,36.6 10.9,36.6 10.9,38 13.9,41
NetA2_2 on Top Layer "-12v_filt" (solid, remove dead copper, pour order 18): 20.9,40 30.9,40 36.9,34 36.9,29 30.9,29 30.9,33.5 28.4,36 20.9,36
NetC1_1 on Top Layer "+12v_fused" (solid, remove dead copper, pour order 17): 1.9,43 1.9,28 7.1,28 7.1,37 10.5,37 10.5,38.2 17.9,45.6 17.9,50 13.9,50 11.9,48 11.9,44 10.9,43
12V_F+ on Top Layer "+12v" (solid, remove dead copper, pour order 16): 20.9,50 36.9,50 36.9,43 20.9,43
+5V on Top Layer "5v" (solid, remove dead copper, pour order 20): 15,70 20.75,70 20.75,51 15,51
12V- on Bottom Layer "-12v" (solid, remove dead copper, pour order 11): 7,84 100.5,84 100.5,68.5 73.5,68.5 67.5,74.5 7,74.5
12V- on Bottom Layer "-12v" (solid, remove dead copper, pour order 19): 18,28 1,28 1,84 14,84 14,50 18,50
12V- on Bottom Layer "-12v" (solid, remove dead copper, pour order 13): 101.5,1 101.5,16 73.5,16 68,10.5 18,10.5 18,28.501 1,28.501 1,1
GND on Bottom Layer "gnd" (solid, remove dead copper, pour order 15): 15.5,73 67.5,73 79,61.5 153.5,61.5 153.5,21 68.5,21 59.5,12 19.5,12 19.5,49.5 15.5,53.5

## Keep-outs
Keep-Out Layer:
  the board outline again, w0.2

## Silkscreen, mask and mechanical layers (free items; w line width, h text height)
Top Overlay:
  drawing of 20 lines, arcs and shapes, not listed

## Text inside footprints (layer, text, board x,y; h text height)
A1: Top Overlay "1" at 14.838,60.904 h2; Top Overlay "2" at 14.836,71.572 h2; Top Overlay "39" at 65.13,60.904 h2; Top Overlay "40" at 65.13,71.572 h2
K1: Top Overlay "1" at 108.6,59.5 h2 r90
K2: Top Overlay "1" at 122.4,59.5 h2 r90
K3: Top Overlay "1" at 136.2,59.5 h2 r90
K4: Top Overlay "1" at 108.6,18.5 h2 r90
K5: Top Overlay "1" at 122.4,18.5 h2 r90
K6: Top Overlay "1" at 136.2,18.5 h2 r90
L1: Top Overlay "2" at 25.1,37.7 h2; Top Overlay "3" at 25.1,46.2 h2; Top Overlay "4" at 11.6,46.2 h2; Top Overlay "1" at 11.6,37.7 h2